# EAGLE board raspi_zero_power_sensor_hat_panel (EAGLE 7.7.0), part 1 of 6
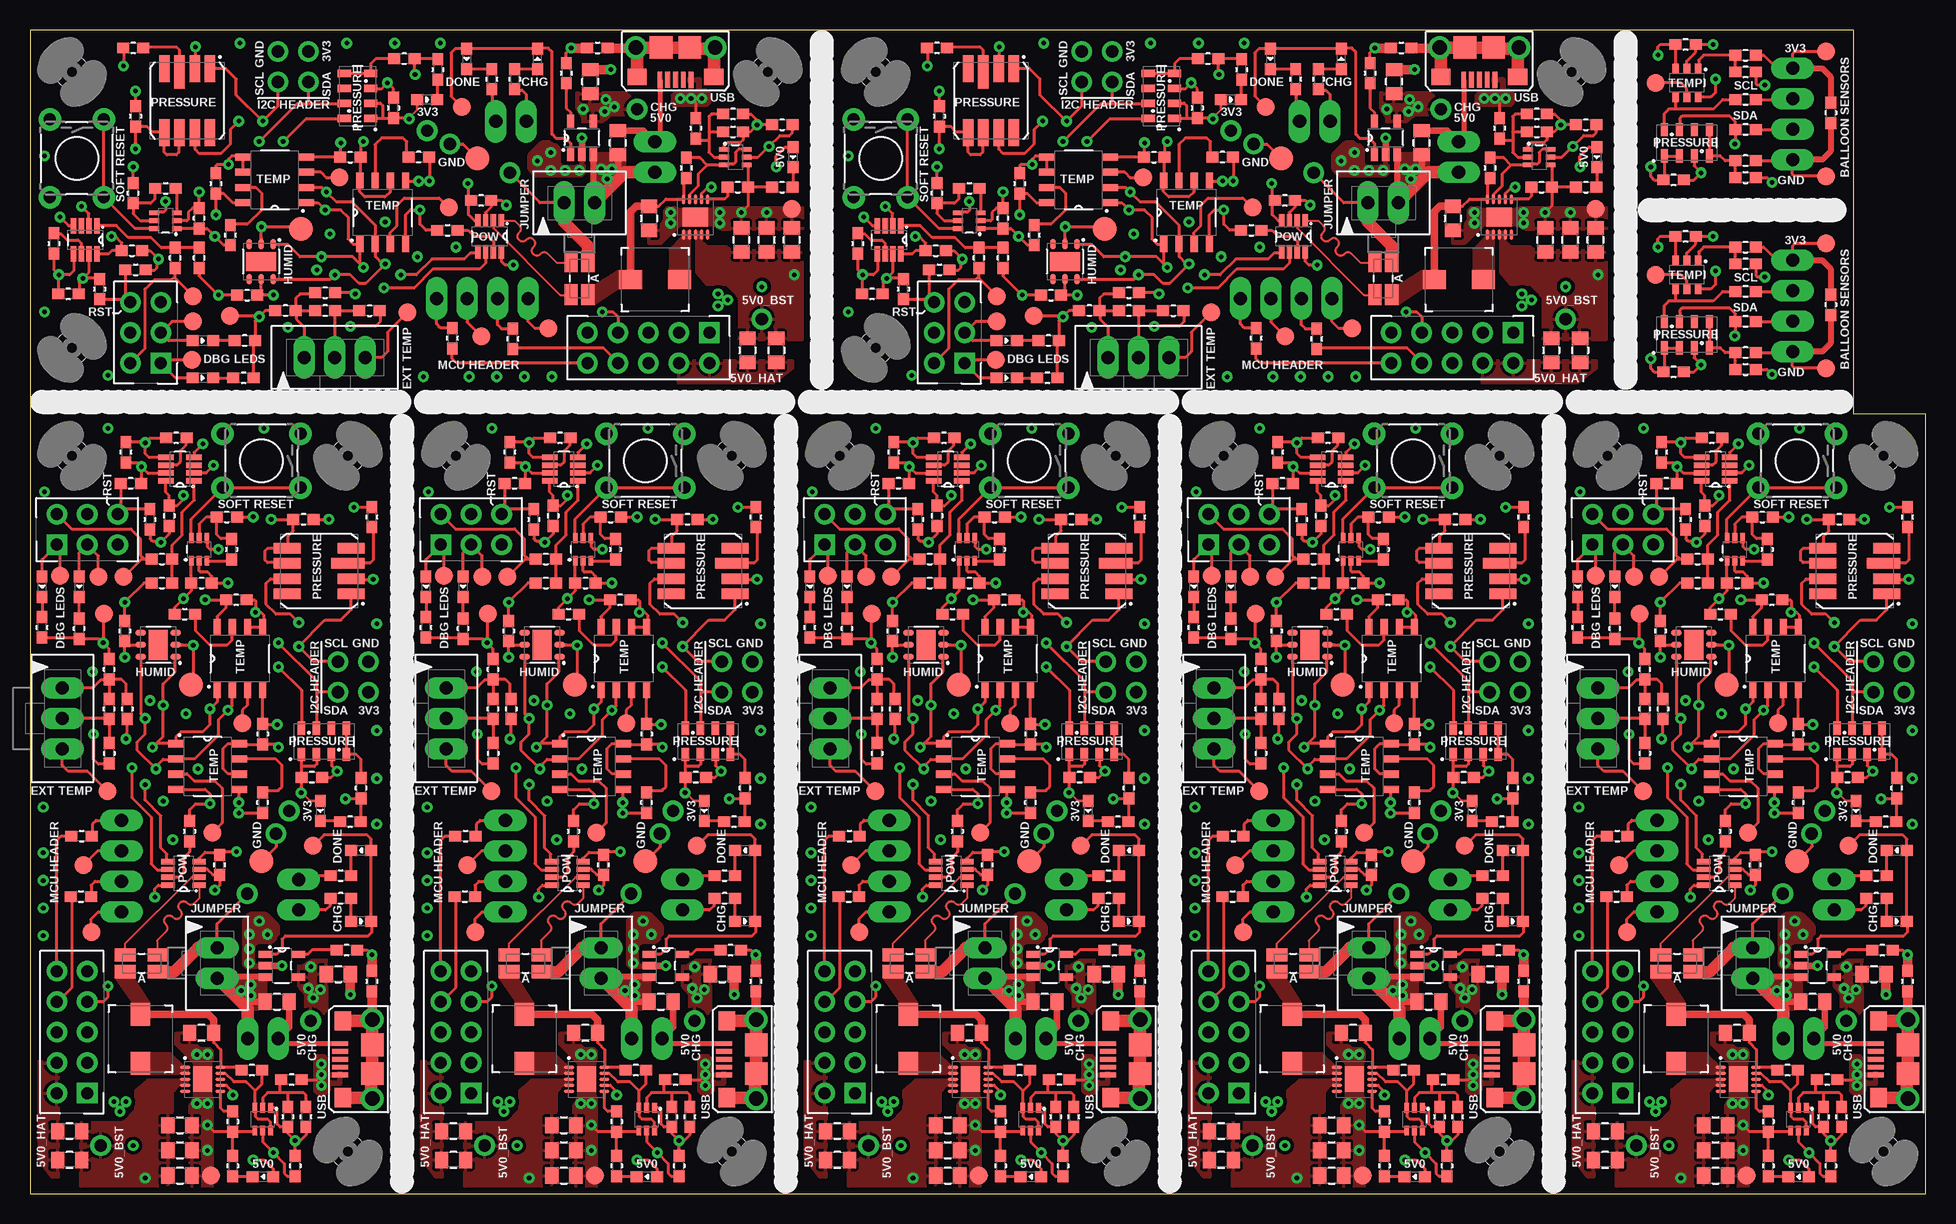
[diagram p0: board, top side]
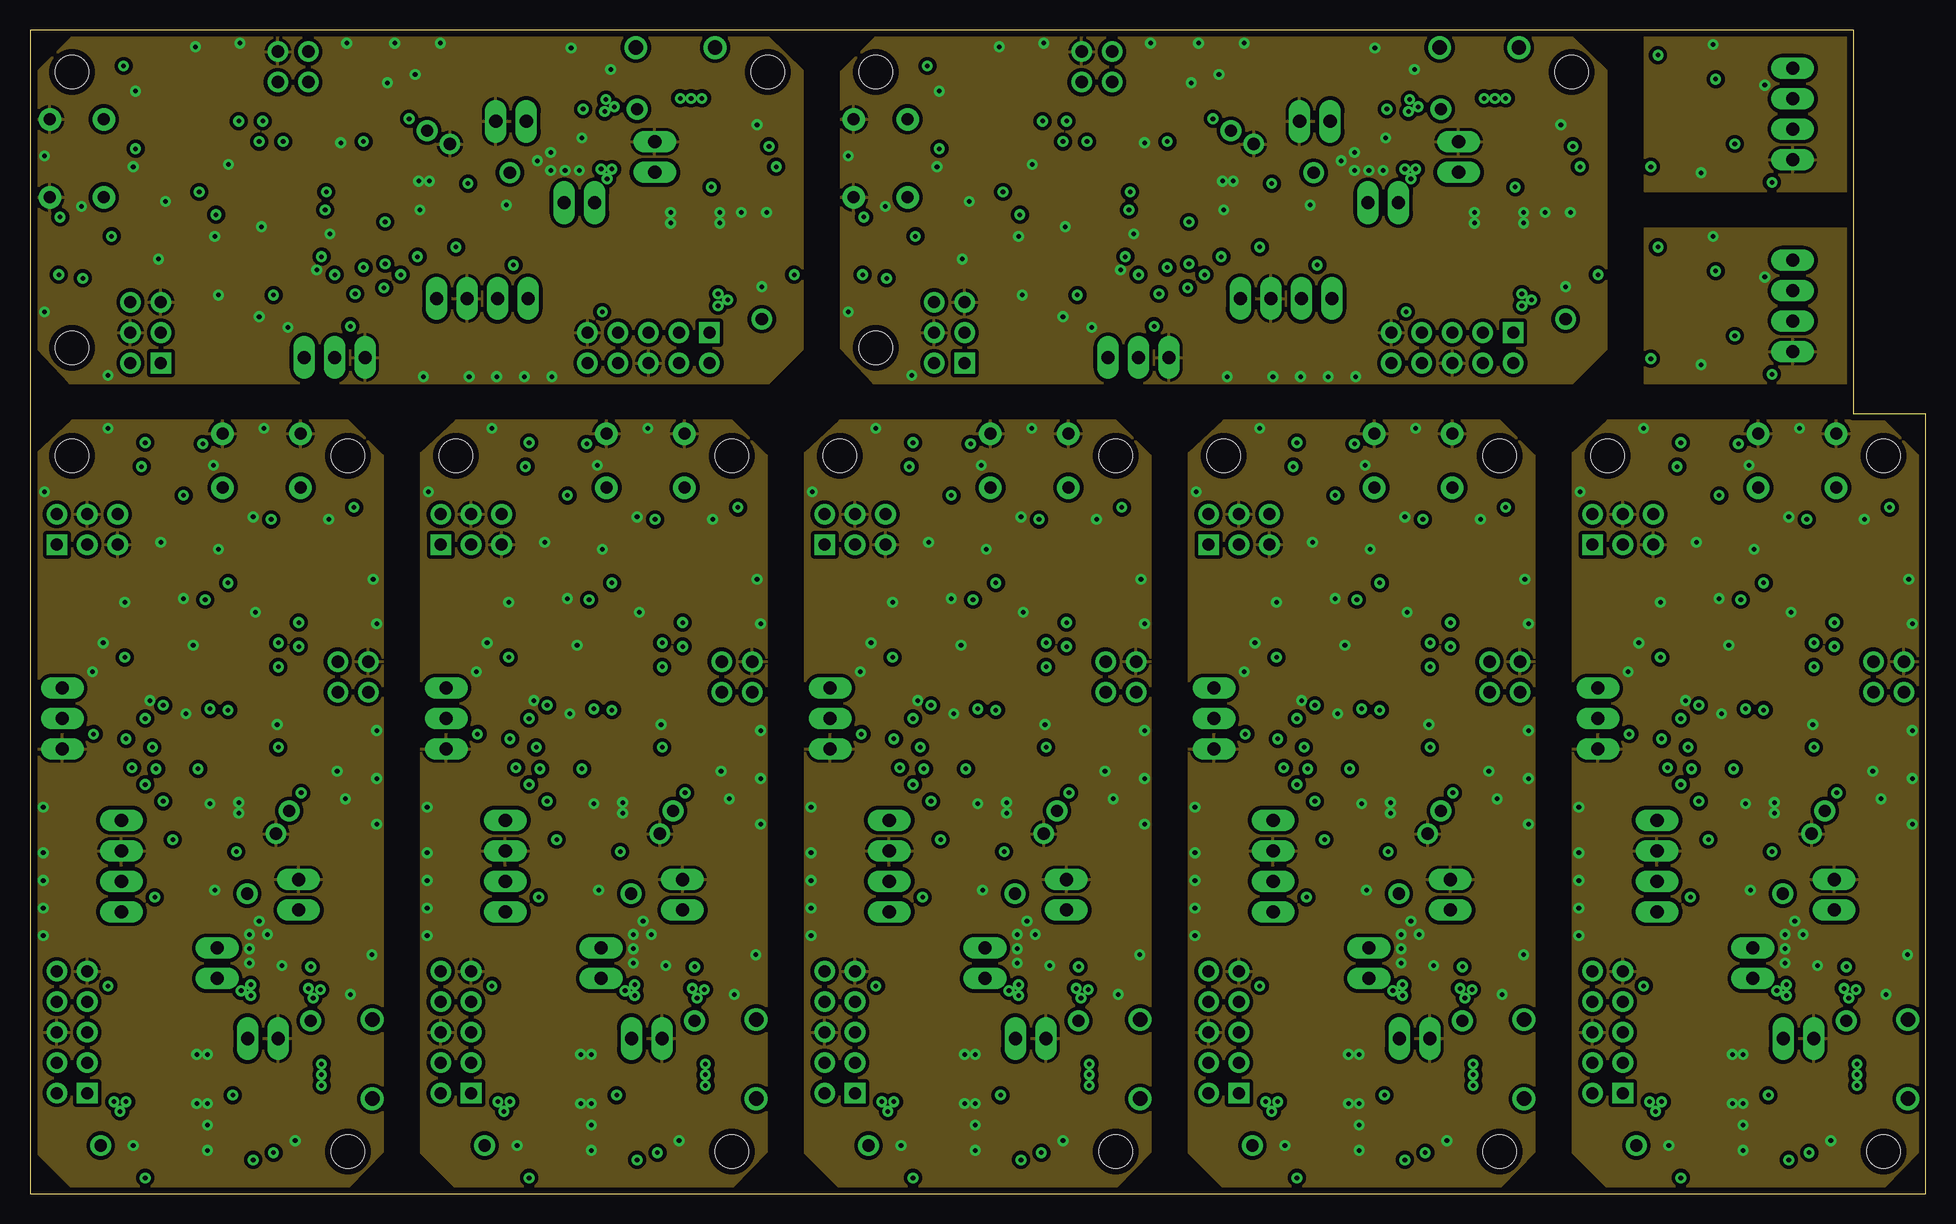
[diagram p1: board, inner layer GND]
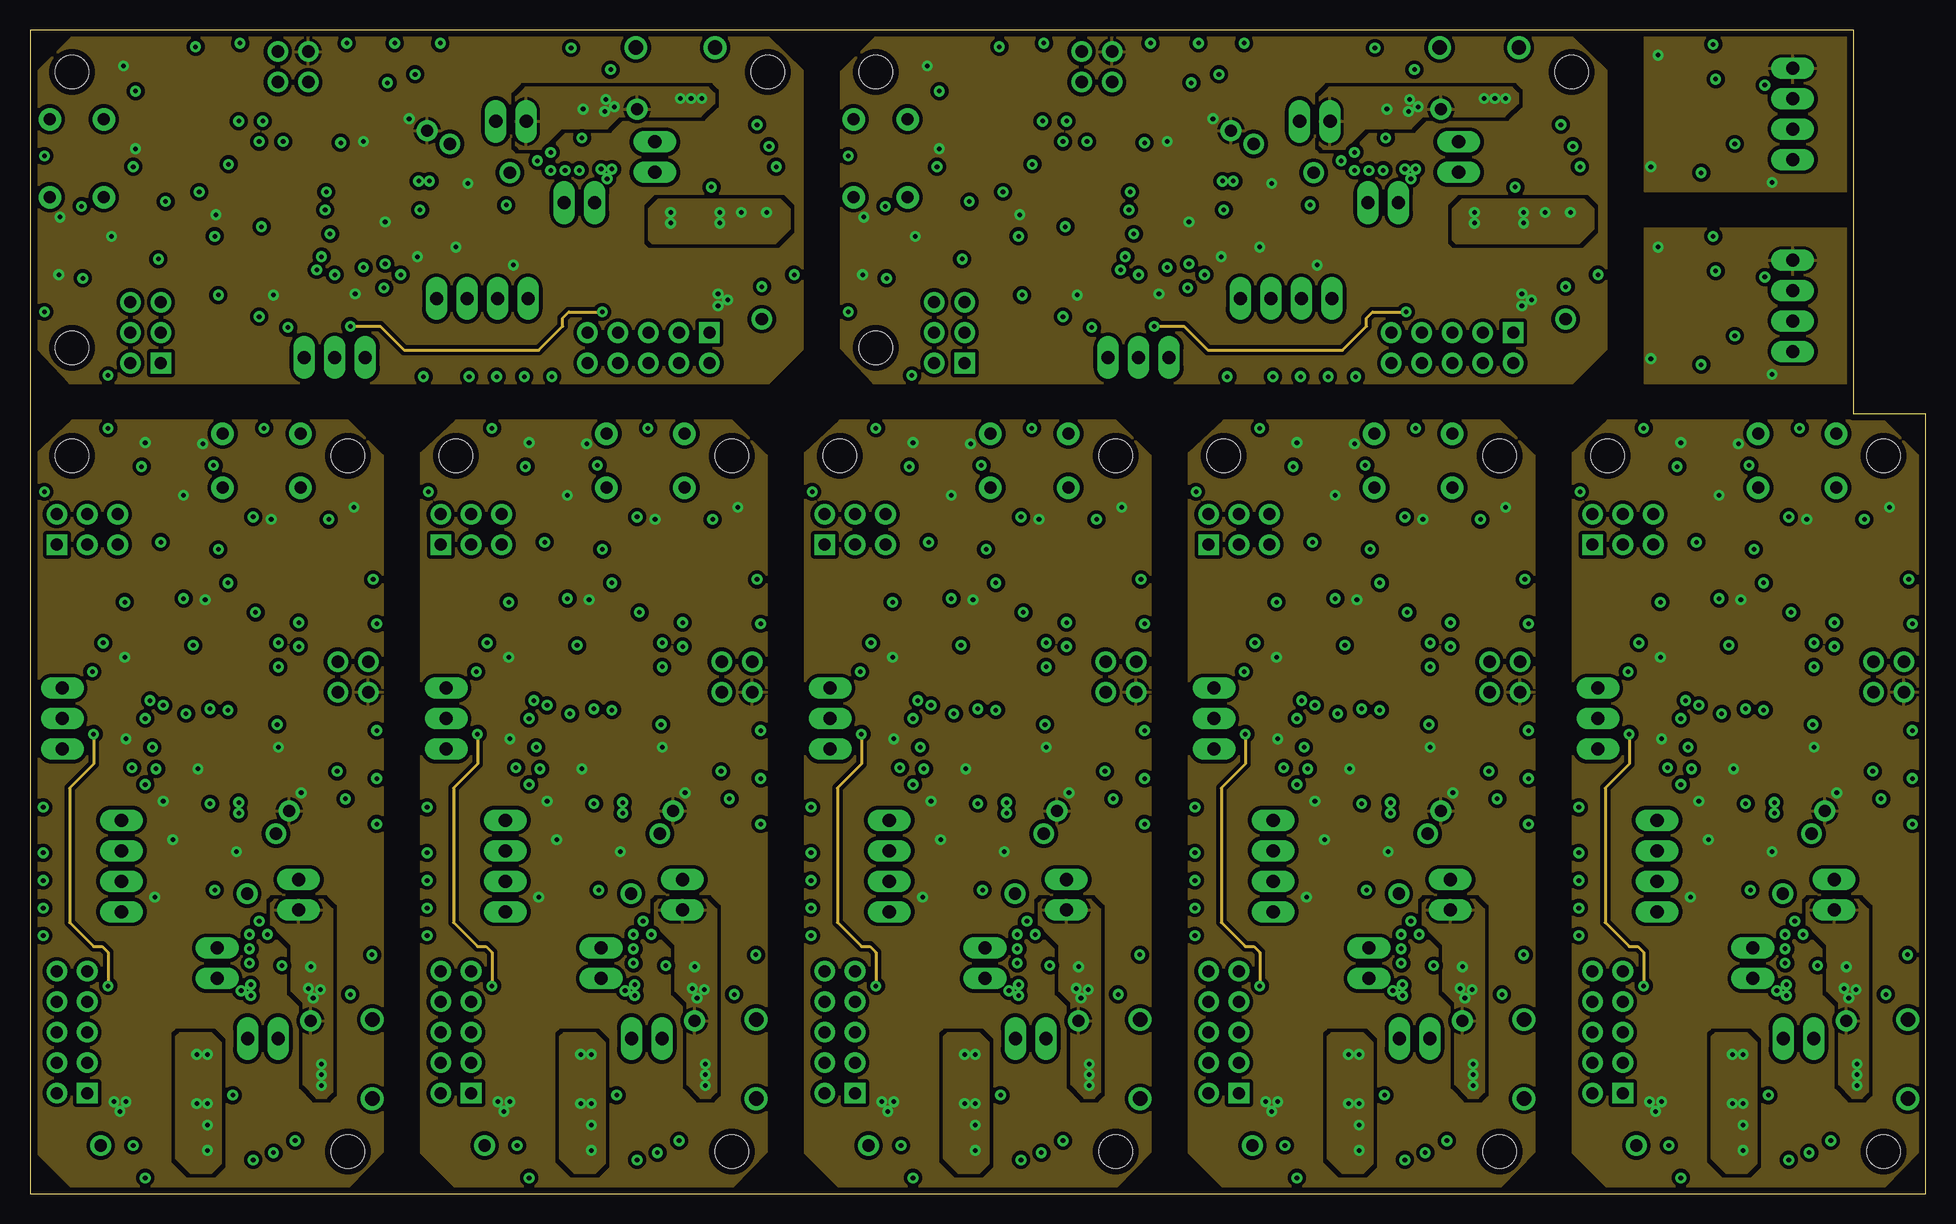
[diagram p2: board, inner layer PWR]
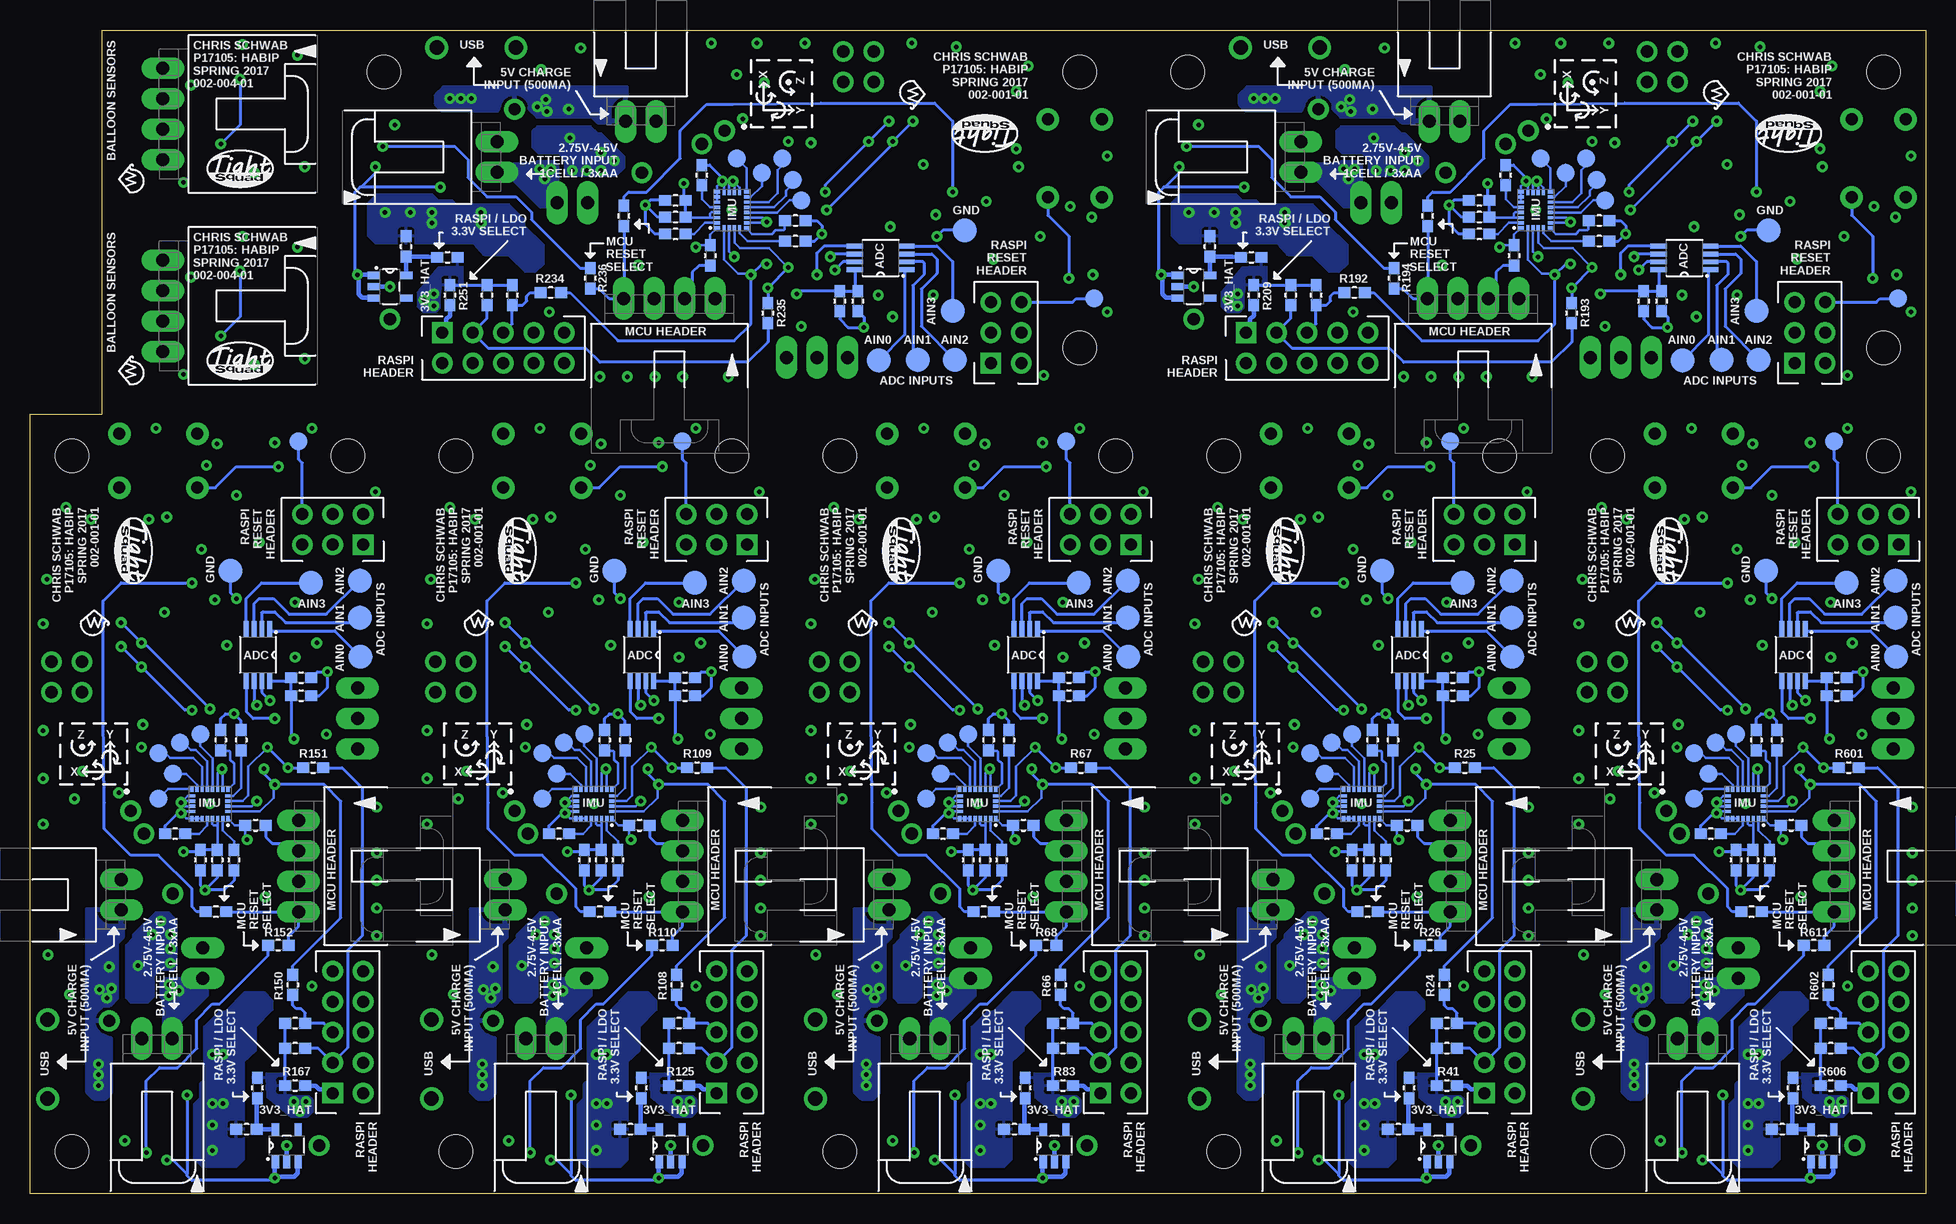
[diagram p3: board, bottom side, seen from below]

Size 158 x 97 mm. Coordinates in mm from the lower left corner, seen from the top.
Outline: 0,0 158,0 158,65 152,65 152,97 0,97 0,0
Copper layers (1+2*15+16): Top 0.035mm / dielectric 0.486mm / GND 0.035mm / dielectric 0.488mm / PWR 0.035mm / dielectric 0.486mm / Bottom 0.035mm
Design rules "4layer_4pcb": minimum track width 6mil, minimum drill 15mil, track to track 6mil, track to pad 6mil, pad to pad 6mil, via to via 6mil, smd to smd 6mil, copper to edge 20mil, drill to drill 10mil, minimum pad ring 14mil, minimum via ring 10mil, stop-mask expansion 2.5mil, vias tented up to drill 16mil, thermal gap 10mil
Net classes: 0 default: drill 0.381 mm, clearance 0.152 mm; 1 diff_pair: width 0.178 mm, drill 0.381 mm, clearance 0.178 mm

## Footprints (pad centres in the part's own frame; a part is rotated, then mirrored left to right if it is on the bottom)
C0603 = smd 1 x 0.9: 1 -0.85,0; 2 0.85,0
C0805 = smd 1.1 x 1.35: 1 -1,0; 2 1,0
LED0603 = smd 1 x 0.9: 1 -0.85,0; 2 0.85,0
R0603 = smd 1 x 0.9: 1 -0.85,0; 2 0.85,0
MOLSL-2-RA = drill 1.09 long: 1 -1.27,-7.62; 2 1.27,-7.62
MOLSL-3-V = drill 1.09 long: 1 -2.54,0; 2 0,0; 3 2.54,0
RECEPTACLE-2X3-254MM = drill 1 pad 1.5 square: 1 -2.54,-1.27 | drill 1 pad 1.5: 2 -2.54,1.27; 3 0,-1.27; 4 0,1.27; 5 2.54,-1.27; 6 2.54,1.27
MICROUSB-RIGHT = smd 0.4 x 1.35: 1 -1.3,2.675; 2 -0.65,2.675; 3 0,2.675; 4 0.65,2.675; 5 1.3,2.675 | drill 1.2 pad 1.6: S1 -3.3,0; S2 3.3,0 | smd 1.6 x 1.4: S3 -3.2,2.45; S4 3.2,2.45 | smd 1.9 x 1.9: S5 -1.2,0; S6 1.2,0
MOLSL-2-RA_HALF = drill 1.09 long: 1 -1.27,-7.62; 2 1.27,-7.62
RECEPTACLE-2X5-254MM = drill 1 pad 1.5 square: 1 -5.08,-1.27 | drill 1 pad 1.5: 2 -5.08,1.27; 3 -2.54,-1.27; 4 -2.54,1.27; 5 0,-1.27; 6 0,1.27; 7 2.54,-1.27; 8 2.54,1.27; 9 5.08,-1.27; 10 5.08,1.27
MOLSL-2-V = drill 1.09 long: 1 -1.27,0; 2 1.27,0
MOLSL-4-RA_HALF = drill 1.09 long: 1 -3.81,-7.62; 2 -1.27,-7.62; 3 1.27,-7.62; 4 3.81,-7.62
MOLSL-4-RA = drill 1.09 long: 1 -3.81,-7.62; 2 -1.27,-7.62; 3 1.27,-7.62; 4 3.81,-7.62
SMD410P190X160-2N = smd 1.9 x 1.6: 1 -2.05,0; 2 2.05,0
RASPI_ZERO_3STANDOFFS_ONLY = hole 2.75: 3.5,3.5; 61.5,3.5; 61.5,26.5
SOT363P080X040-6N = smd 0.8 x 0.4: 1 -0.95,0.65; 2 -0.95,0; 3 -0.95,-0.65; 4 0.95,-0.65; 5 0.95,0; 6 0.95,0.65
R0805 = smd 1.1 x 1.35: 1 -1,0; 2 1,0
RS1206 = smd 1.75 x 1.1: 1A -1.375,-0.7; 1V -1.375,0.7; 2A 1.375,-0.7; 2V 1.375,0.7
TACTILE-PTH = drill 1.016 pad 1.88: 1 3.25,-2.25; 2 -3.25,-2.25; 3 3.25,2.25; 4 -3.25,2.25
TP15R = smd 1.5 x 1.5: TP 0,0
TP20R = smd 2 x 2: TP 0,0
TP_TH102 = drill 1.02: 1 0,0
SOT65P110X045-8N = smd 1.1 x 0.45: 1 -1.3,0.975; 2 -1.3,0.325; 3 -1.3,-0.325; 4 -1.3,-0.975; 5 1.3,-0.975; 6 1.3,-0.325; 7 1.3,0.325; 8 1.3,0.975
SMD125P110X060-8N = smd 1.1 x 0.6: 1 -1.1,1.875; 2 -1.1,0.625; 3 -1.1,-0.625; 4 -1.1,-1.875; 5 1.1,-1.875; 6 1.1,-0.625; 7 1.1,0.625; 8 1.1,1.875
SOP65P135X040-8N = smd 1.35 x 0.4: 1 -2.15,0.975; 2 -2.15,0.325; 3 -2.15,-0.325; 4 -2.15,-0.975; 5 2.15,-0.975; 6 2.15,-0.325; 7 2.15,0.325; 8 2.15,0.975
SMD125130P225X090-8N = smd 2.25 x 0.9: 1 -2.675,1.9; 2 -2.675,0.65; 4 -2.675,-1.9; 5 2.675,-1.9; 6 2.675,-0.65; 7 2.675,0.65; 8 2.675,1.9 | smd 2.8 x 0.9: 3 -2.4,-0.65
SOT23P105X060-5N = smd 1.05 x 0.6: 1 -1.35,0.95; 2 -1.35,0; 3 -1.35,-0.95; 4 1.35,-0.95; 5 1.35,0.95
SOT23P130X045-8N = smd 1.3 x 0.45: 1 -1.175,0.975; 2 -1.175,0.325; 3 -1.175,-0.325; 4 -1.175,-0.975; 5 1.175,-0.975; 6 1.175,-0.325; 7 1.175,0.325; 8 1.175,0.975
LGA043P045X033-24N = smd 0.275 x 0.45: 1 -1.505,1.225; 6 -1.505,-1.225; 7 -1.075,-1.225; 8 -0.645,-1.225; 9 -0.215,-1.225; 10 0.215,-1.225; 11 0.645,-1.225; 12 1.075,-1.225; 13 1.505,-1.225; 18 1.505,1.225; 19 1.075,1.225; 20 0.645,1.225; 21 0.215,1.225; 22 -0.215,1.225; 23 -0.645,1.225; 24 -1.075,1.225 | smd 0.45 x 0.275: 2 -1.475,0.645; 3 -1.475,0.215; 4 -1.475,-0.215; 5 -1.475,-0.645; 14 1.475,-0.645; 15 1.475,-0.215; 16 1.475,0.215; 17 1.475,0.645
DFN-100P085X045-T-6N = smd 0.85 x 0.45: 1 -1.45,1; 2 -1.45,0; 3 -1.45,-1; 4 1.45,-1; 5 1.45,0; 6 1.45,1 | smd 1.6 x 2.5: PAD 0,0
SOT23P110X060-5N = smd 1.1 x 0.6: 1 -1.4,0.95; 2 -1.4,0; 3 -1.4,-0.95; 4 1.4,-0.95; 5 1.4,0.95
DRC0010G_SM = smd 0.825 x 0.28: 1 -1.462,1; 2 -1.462,0.5; 3 -1.462,0; 4 -1.462,-0.5; 5 -1.462,-1; 6 1.462,-1; 7 1.462,-0.5; 8 1.462,0; 9 1.462,0.5; 10 1.462,1 | smd 1.6 x 2.15: 11 0,0
SOIC127P130X0600-8N = smd 1.3 x 0.6: 1 -2.65,1.905; 2 -2.65,0.635; 3 -2.65,-0.635; 4 -2.65,-1.905; 5 2.65,-1.905; 6 2.65,-0.635; 7 2.65,0.635; 8 2.65,1.905
TSOP95P080X055-6N = smd 0.8 x 0.55: 1 -1.2,0.95; 2 -1.2,0; 3 -1.2,-0.95; 4 1.2,-0.95; 5 1.2,0; 6 1.2,0.95